# Altium PCB WiirdFlex Top.PcbDoc
Units mm, origin at the board's own origin, x right, y up, seen from the top; angles counter-clockwise.
Board outline 75 x 66.5 mm, 2 copper layers (Top Layer, Bottom Layer); 12 components, 20 nets, 79 pads, 0 vias.
Unrouted connection lines stored in the file: 19.
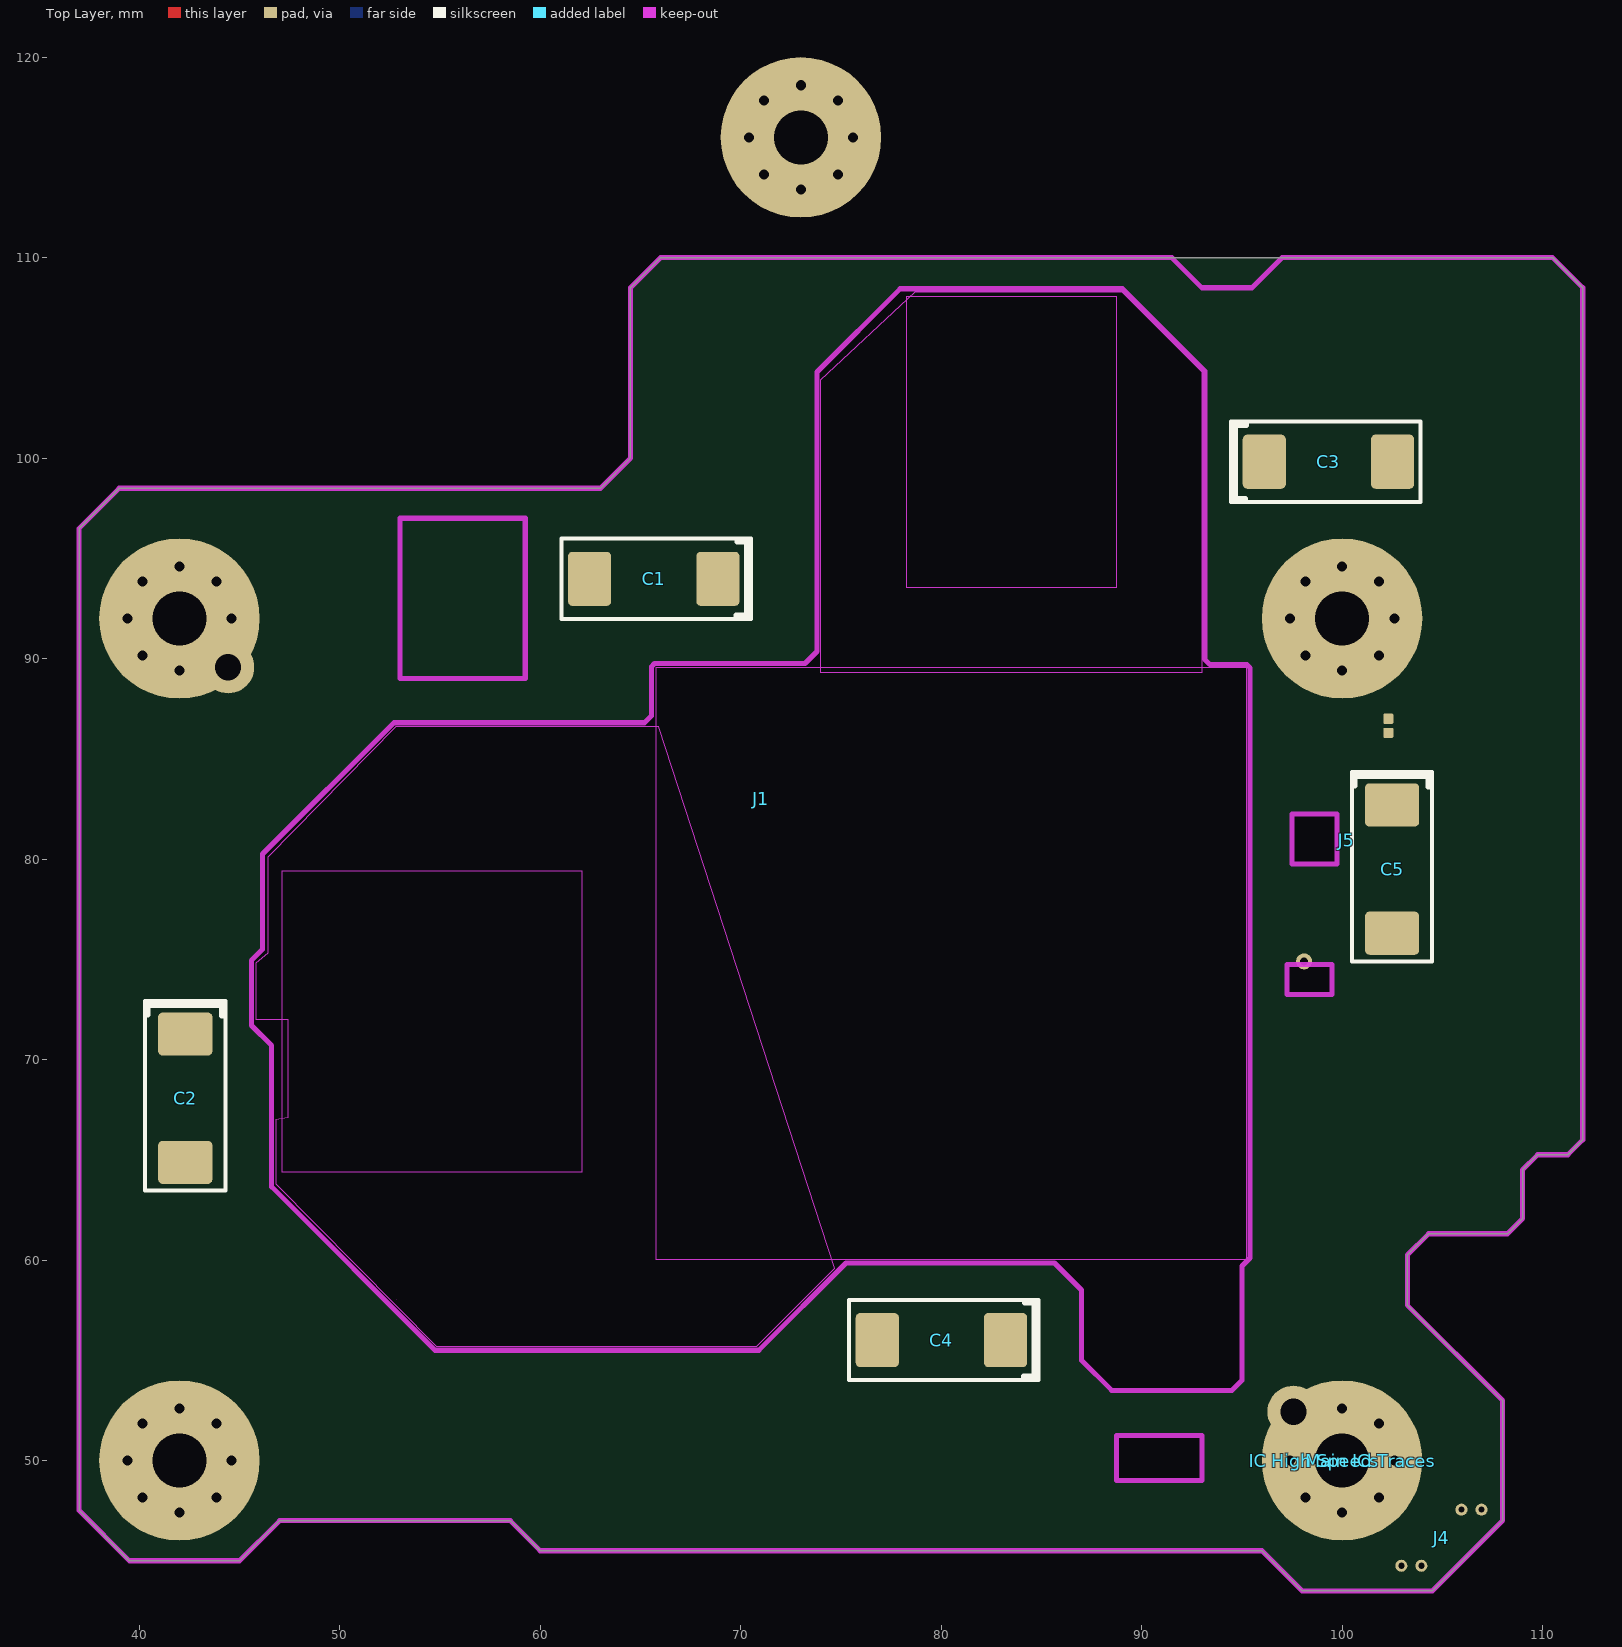
[diagram p0: Top Layer view]
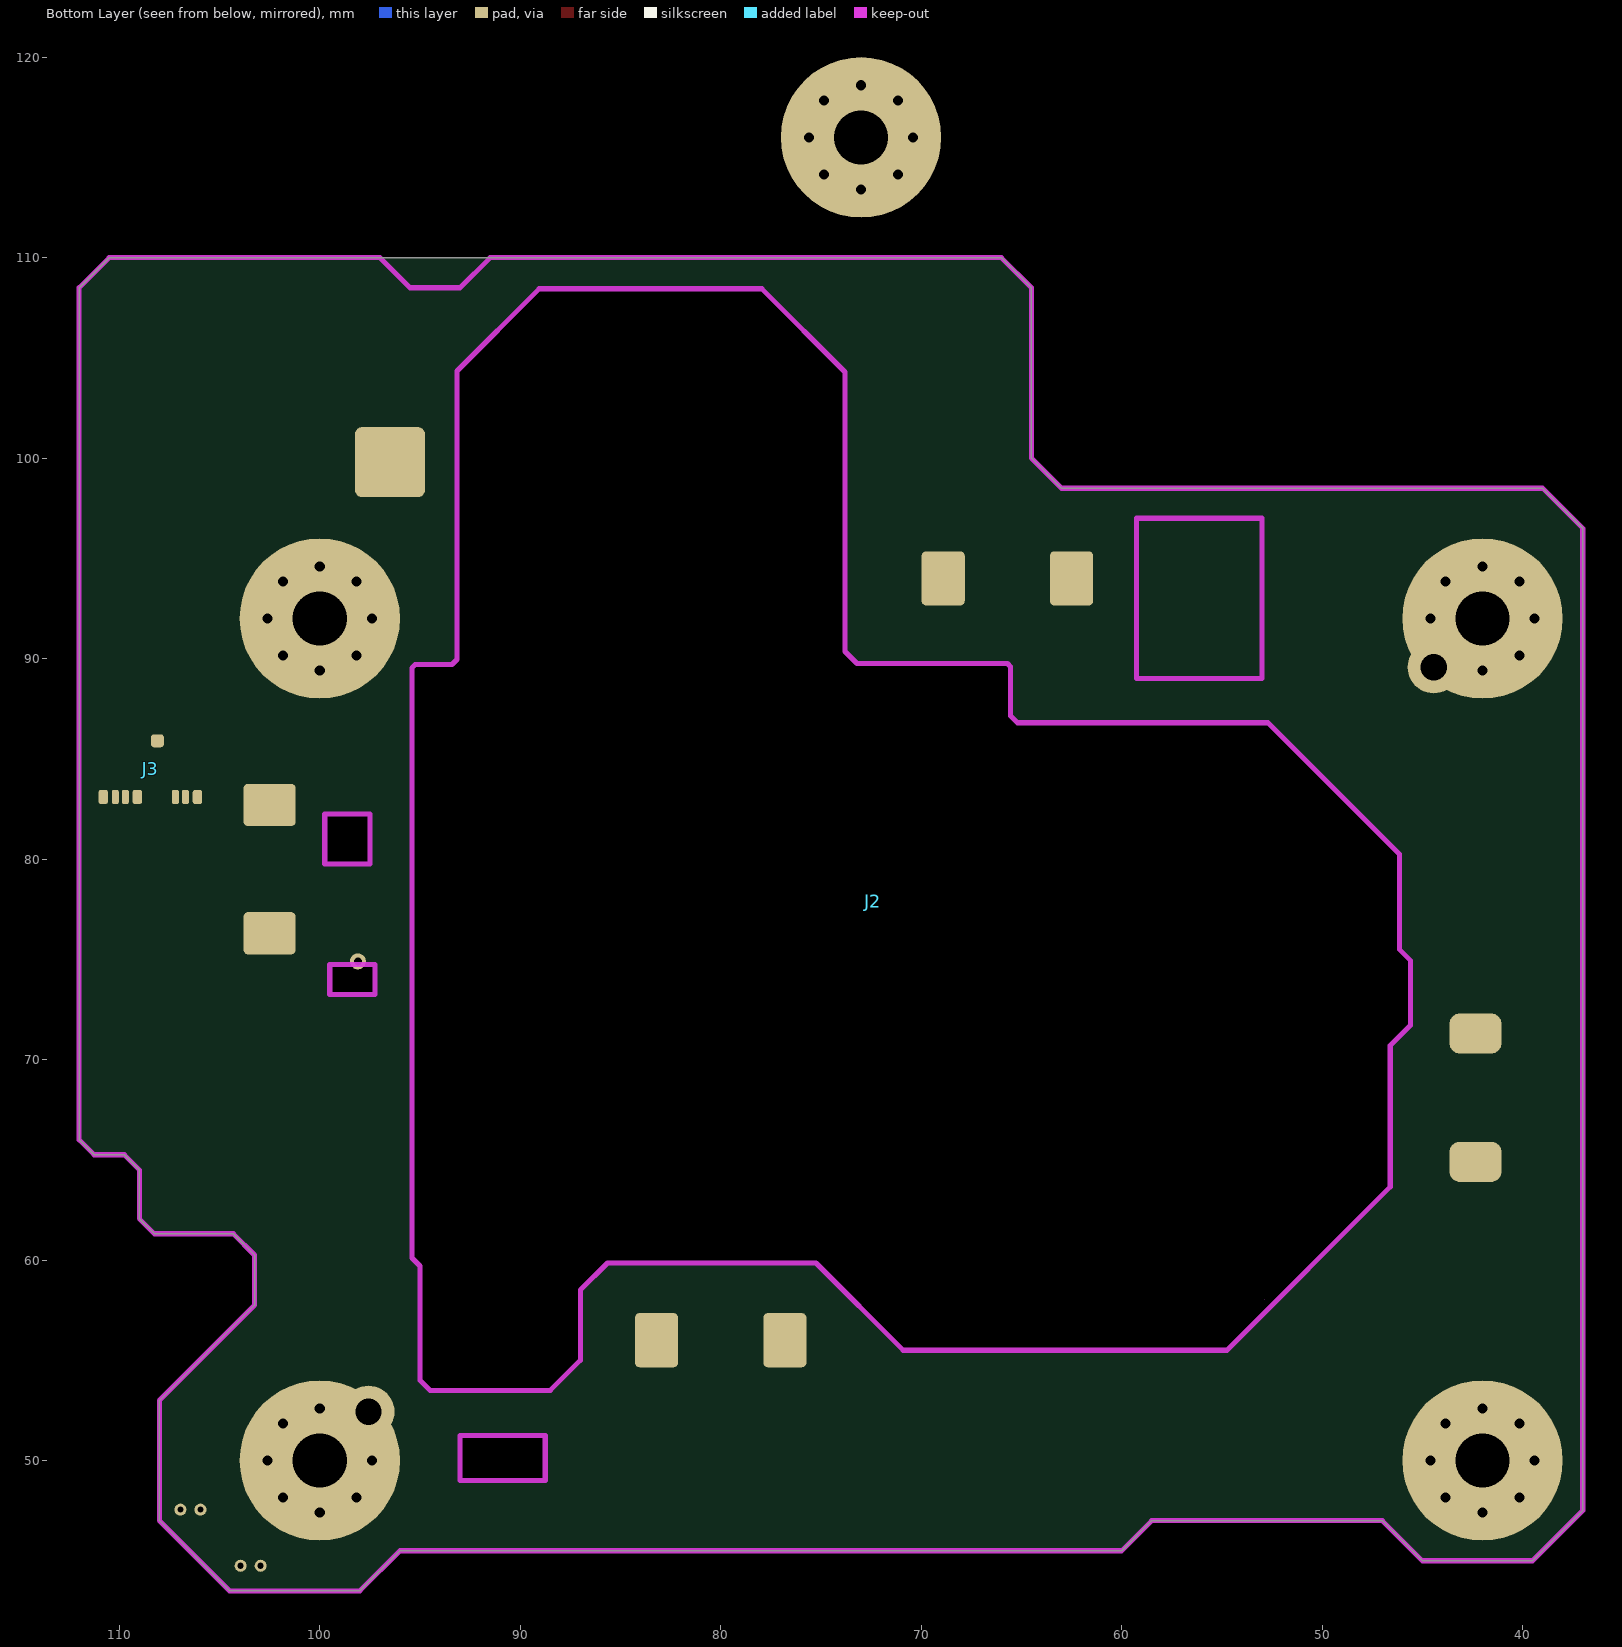
[diagram p1: Bottom Layer view, seen from below]

## Layer stack, top to bottom
Top Solder: solder mask 0.0102, Solder Resist, Dk 3.5
Top Layer: signal copper 0.0356
Dielectric 1: dielectric 0.32, FR-4, Dk 4.8
Bottom Layer: signal copper 0.0356
Bottom Solder: solder mask 0.0102, Solder Resist, Dk 3.5

## Board outline
39.5,45 45,45 47,47 58.5,47 60,45.5 96,45.5 98,43.5 104.5,43.5 108,47 108,53 103.25,57.75 103.25,60.25 104.312,61.312 108.25,61.312 109,62.062 109,64.5 109.75,65.25 111.25,65.25 112,66 112,108.5 110.5,110 66,110 64.5,108.5 64.5,100 63,98.5 39,98.5 37,96.5 37,47.5
cut-out: 94.5,53.5 95,54 95,59.7 95.4,60.1 95.4,89.54 95.24,89.7 93.4,89.7 93.15,89.95 93.15,104.35 89.05,108.45 77.95,108.45 73.8,104.3 73.8,90.35 73.2,89.75 65.7,89.75 65.55,89.6 65.55,87.15 65.2,86.8 52.7,86.8 46.15,80.25 46.15,75.5 45.6,74.95 45.6,71.7 46.6,70.7 46.6,63.65 54.75,55.5 70.9,55.5 75.25,59.85 85.65,59.85 87,58.5 87,55 88.5,53.5
cut-out: 97.5,82.25 97.5,79.75 99.75,79.75 99.75,82.25
cut-out: 97.25,74.75 97.25,73.25 99.5,73.25 99.5,74.75
cut-out: 88.75,51.25 93,51.25 93,49 88.75,49
cut-out: 52.85,58.05

## Design rules (kind name [scope] priority, off if disabled: settings)
Clearance [All] p1: gap=0.254 ignorepadtopadclearanceinfootprint=FALSE except(0: Arc-Hole Track-Hole SMDPad-Hole THPad-Hole Via-Hole Fill-Hole Poly-Hole Region-Hole Text-Hole)
ComponentClearance FakeComponentClearance [InComponentClass('Keepout')] p1: gap=0 collisioncheckmode=3 verticalgap=0 showdistances=FALSE // some components are fake.  copper collisions, keepouts, etc., will still apply but component clearance is meaningless for these.
ComponentClearance [All] p2: gap=0.254 collisioncheckmode=3 verticalgap=0.254 showdistances=TRUE
HoleSize [All] p1: absolutevalues=TRUE maxlimit=5 minlimit=0.025 maxpercent=80.000 minpercent=20.000
PolygonConnect [All] p1: connectstyle=Relief reliefconductorwidth=0.254 reliefentries=4 polygonreliefangle="90 Angle" airgapwidth=0.254
RoutingVias [All] p1: holewidth=0.711 width=1.27 viastyle="Through Hole" minholewidth=0.711 minwidth=1.27 maxholewidth=0.711 maxwidth=1.27
SolderMaskExpansion [All] p1: expansion=0.102 istentingtop=FALSE
Width [All] p1: maxlimit=0.254 minlimit=0.254 preferedwidth=0.254
28 further rules are at their usual default settings.

## Classes and differential pairs
component class Keepout: "IC High Speed Traces" "Main ICs"

## Components (designator, comment, footprint, x,y, rotation, side; value= is the part's Value field where it differs from the comment)
C1 "Cap Pol3" CAPCP5932X25M 65.659,93.98 r180 top value=33uF
C2 "Cap Pol3" CAPCP5932X25M 42.291,68.072 r270 top value=15uF
C3 "Cap Pol3" CAPCP5932X25M 99.314,99.822 r0 top value=15uF
C4 "Cap Pol3" CAPCP5932X25M 80.01,56.007 r180 top value=12uF
C5 "Cap Pol3" CAPCP5932X25M 102.489,79.502 r270 top value=220uF
"IC High Speed Traces" "Keepout" RVK-1_Top_Impedance_Control_Area 100,50 r0 top locked
J1 "RVK-01_Ground_MountingScrews" RVK-1_GND_Screws 100,50 r0 top locked
J2 "RVK-1_Power_Rails" RVK-1_Power_Rails_Top_Direct 100,50 r0 top locked
J3 "RVK-1_SD_Bus" RVK-1_SD_Direct 100,50 r0 top locked
J4 "RVK-1_USB_Both" RVK-1_USB_Top 100,50 r0 top locked
J5 "RVK-01_Bluetooth_Data" RVK-1_BT_Data 100,50 r0 top
"Main ICs" "Keepout" RVK-1_Main_IC_Keepout 100,50 r0 top locked

## Footprints (in the part's own frame and the unit in brackets; to place one, negate y for a bottom-side part, rotate by r counter-clockwise, add the part's x,y. Pads: shape width x height; smd on the part's side, far side on the other; paste and mask are expansions set on the pad)
CAPCP5932X25M [mm] "Chip Capacitor, 2-Leads, Body 5.90x3.25mm, IPC Low Density"
  rrect20% 2.15x2.7 smd: 1(-3.2,0) 2(3.2,0)
  silkscreen extent -4.85,-2 4.6,2, body extent -2.9,-1.65 2.9,1.65, height 2.5
RVK-1_BT_Data [mm]
  rrect20% 0.5x0.5 smd: 1(2.3,36.3) 2(2.3,37)
  round 0.8 hole 0.4: 3(-1.9,24.9)
RVK-1_GND_Screws [mm]
  round 1 hole 0.5: 1(-60.6,0) 1(-60.6,42) 1(-59.84,-1.84) 1(-59.84,1.84) 1(-59.84,40.16) 1(-59.84,43.84) 1(-58,-2.6) 1(-58,2.6) 1(-58,39.4) 1(-58,44.6) 1(-56.16,-1.84) 1(-56.16,1.84) 1(-56.16,43.84) 1(-55.4,0) 1(-55.4,42) 1(-29.6,66) 1(-28.84,64.16) 1(-28.84,67.84) 1(-27,63.4) 1(-27,68.6) 1(-25.16,64.16) 1(-25.16,67.84) 1(-24.4,66) 1(-2.6,0) 1(-2.6,42) 1(-1.84,-1.84) 1(-1.84,40.16) 1(-1.84,43.84) 1(0,-2.6) 1(0,2.6) 1(0,39.4) 1(0,44.6) 1(1.84,-1.84) 1(1.84,1.84) 1(1.84,40.16) 1(1.84,43.84) 1(2.6,0) 1(2.6,42)
  round 8 hole 2.7: 1(-58,0) 1(-58,42) 1(-27,66) 1(0,0) 1(0,42)
  round 2.6 hole 1.3: 1(-55.568,39.568) 1(-2.432,2.432)
RVK-1_Main_IC_Keepout [mm]
  Top Layer keep-out region: -21.75,43.55 -11.25,43.55 -11.25,58.05 -21.75,58.05
  Top Layer keep-out region: -34.25,10.05 -4.75,10.05 -4.75,39.55 -34.25,39.55
  Top Layer keep-out region: -52.9,14.4 -37.9,14.4 -37.9,29.4 -52.9,29.4
RVK-1_Power_Rails_Top_Direct [mm] "Direct solder-to-board attachment options for Wii power rails.  Includes pads to attach to the Wii in place of existing bulk capacitors (those capacitors would then be relocated to the interface board"
  rrect50% 2.6x2 smd far side: 1(-57.65,14.9) 3(-57.65,21.3)
  rrect20% 2.15x2.7 smd far side: 1(-37.5,44) 1(-23.2,6) 2(-31.1,44) 4(-16.8,6)
  rrect20% 2.6x2.1 smd far side: 1(2.5,26.3) 5(2.5,32.7)
  rrect20% 3.5x3.5 smd far side: 4(-3.5,49.8)
RVK-1_SD_Direct [mm] "Direct pad-to-pad interface to SD lines by replacing terminating resistors"
  rrect50% 0.475x0.7 smd far side: 1(6.1,33.1) 5(9.1,33.1) 8(10.8,33.1)
  rrect50% 0.35x0.7 smd far side: 2(6.7,33.1) 3(7.2,33.1) 6(9.7,33.1) 7(10.2,33.1)
  rrect50% 0.65x0.65 smd far side: 4(8.1,35.9)
RVK-1_Top_Impedance_Control_Area [mm] "Optional footprint providing keep-outs for the impedance-controlled signal area around the main Wii chips on the top side of the board"
  Top Layer keep-out region: -47.2,36.6 -53.6,30.1 -53.6,25.3 -54.2,24.8 -54.2,22 -52.6,22 -52.6,17.1 -53.2,17 -53.2,13.8 -45.2,5.7 -29.2,5.7 -25.3,9.6 -34.1,36.6
  Top Layer keep-out region: -26,39.3 -26,53.9 -21.3,58.3 -11,58.3 -7,54.3 -7,39.3
RVK-1_USB_Top [mm] "USB vias, the easiest way to access USB from the top side.  This is upstream of ESD protection."
  round 0.6 hole 0.3: 1(3.95,-5.25) 2(2.95,-5.25) 3(5.95,-2.45) 4(6.95,-2.45)

## Part data
C1 C2 C3 C4 C5: "Polarized Capacitor (Surface Mount)", LatestRevisionDate=29-May-2009, LatestRevisionNote="IPC-7351 Footprint Added.", PackageDescription="Chip Capacitor", PackageReference=C0805, Published=8-Jun-2000, Publisher="Altium Limited"
J2: "Connection points for Wii power rails"
"IC High Speed Traces" "Main ICs": ClassName=Keepout

## Nets (pads, with @x,y where several pads share a name; then routed paths per layer and width w, separated by ;. In a path a pad name is that pad's centre, name@x,y a point inside that pad or via, vN(x,y) a via of type N, cw(c..) or ccw(c..) an arc to the next point about the centre after c; other vN are vias at no path point)
1.0V: C1.1 J2.2
1.8V: C3.1 C4.1 J2.4
1.15V: C2.1 J2.3
3.3V: C5.1 J2.5
BT_DATA1: J5.1
BT_DATA2: J5.2
BT_SENSE: J5.3
CD: J3.6
CLK: J3.4
CMD: J3.1
D1+: J4.2
D1-: J4.1
D2+: J4.4
D2-: J4.3
DAT0: J3.8
DAT1: J3.7
DAT2: J3.3
DAT3: J3.2
GND: C1.2 C2.2 C3.2 C4.2 C5.2 J1.1 J2.1
WP: J3.5

## Keep-outs
Keep-Out Layer:
  lines w0.254: 37,47.5 37,96.5 39,98.5 63,98.5 64.5,100 64.5,108.5 66,110 91.5,110 93,108.5 95.5,108.5 97,110 110.5,110 112,108.5 112,66 111.25,65.25 109.75,65.25 109,64.5 109,62.062 108.25,61.312 105.312,61.312 104.312,61.312 103.25,60.25 103.25,57.75 108,53 108,47 104.5,43.5 98,43.5 96,45.5 60,45.5 58.5,47 47,47 45,45 39.5,45 37,47.5 ; 45.6,71.7 46.6,70.7 46.6,63.65 54.75,55.5 70.9,55.5 75.25,59.85 85.65,59.85 87,58.5 87,55 88.5,53.5 94.5,53.5 95,54 95,59.7 95.4,60.1 95.4,89.54 95.24,89.7 93.4,89.7 93.15,89.95 93.15,104.35 89.05,108.45 77.95,108.45 73.8,104.3 73.8,90.35 73.2,89.75 65.7,89.75 65.55,89.6 65.55,87.15 65.2,86.8 52.7,86.8 46.15,80.25 46.15,75.5 45.6,74.95 45.6,71.7 ; 53,89 59.25,89 59.25,97 53,97 53,89 ; 88.75,49 93,49 93,51.25 88.75,51.25 88.75,49 ; 97.25,73.25 97.25,74.75 99.5,74.75 99.5,73.25 97.25,73.25 ; 97.5,79.75 97.5,82.25 99.75,82.25 99.75,79.75 97.5,79.75